# Altium PCB 检测板.PcbDoc
Units mm, origin at the board's own origin, x right, y up, seen from the top; angles counter-clockwise.
Board outline 145.25 x 7.25 mm, 2 copper layers (Top Layer, Bottom Layer); 24 components, 32 nets, 98 pads, 32 vias.
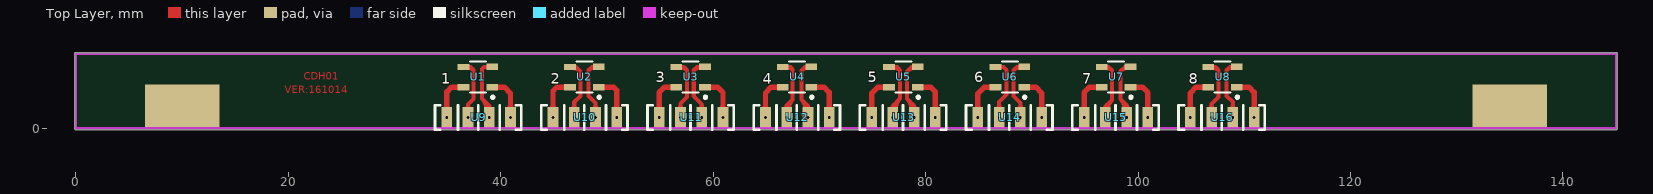
[diagram p0: Top Layer view]
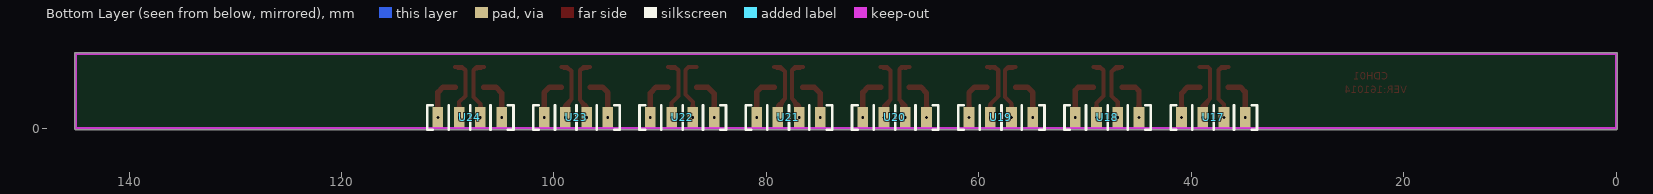
[diagram p1: Bottom Layer view, seen from below]

## Layer stack, top to bottom
Top Layer: signal copper 0.0356
Dielectric: dielectric 0.32, FR-4, Dk 4.8
Bottom Layer: signal copper 0.0356

## Board outline
0,-0.127 cw(c0,0) -0.127,0 -0.127,7 cw(c0,7) 0,7.127 144.985,7.127 cw(c144.985,7) 144.992,7.127 cw(c145,7) 145.127,7 145.127,0 cw(c145,0) 145,-0.127

## Design rules (kind name [scope] priority, off if disabled: settings)
Clearance [All] p1: gap=0.203
PolygonConnect [All] p1: connectstyle=Relief reliefconductorwidth=0.254 reliefentries=4 polygonreliefangle="90 Angle"
RoutingVias [All] p1: holewidth=0.711 width=1.27 viastyle="Through Hole" minholewidth=0.711 minwidth=1.27 maxholewidth=0.711 maxwidth=1.27
SilkscreenOverComponentPads [All] p1: minsilkscreentomaskgap=0.254
SolderMaskExpansion [All] p1: expansion=0.102
Width [All] p1: maxlimit=0.762 minlimit=0.254 preferedwidth=0.508
27 further rules are at their usual default settings.

## Classes and differential pairs
component class 检测板: U1 U2 U3 U4 U5 U6 U7 U8 U9 U10 U11 U12 U13 U14 U16

## Components (designator, comment, footprint, x,y, rotation, side; value= is the part's Value field where it differs from the comment)
U1 "1" SOT-23-4 37.846,4.826 r270 top
U2 "2" SOT-23-4 47.861,4.826 r270 top
U3 "3" SOT-23-4 57.876,4.826 r270 top
U4 "4" SOT-23-4 67.891,4.826 r270 top
U5 "5" SOT-23-4 77.905,4.826 r270 top
U6 "6" SOT-23-4 87.92,4.826 r270 top
U7 "7" SOT-23-4 97.935,4.826 r270 top
U8 "8" SOT-23-4 107.95,4.826 r270 top
U9 "Header 4" PIN4 40.917,1.012 r180 top
U10 "Header 4" PIN4 50.917,1.012 r180 top
U11 "Header 4" PIN4 60.917,1.012 r180 top
U12 "Header 4" PIN4 70.917,1.012 r180 top
U13 "Header 4" PIN4 80.917,1.012 r180 top
U14 "Header 4" PIN4 90.917,1.012 r180 top
U15 "Header 4" PIN4 100.917,1.012 r180 top
U16 "Header 4" PIN4 110.917,1.012 r180 top
U17 "Header 4" PIN4 40.917,1.012 r180 bottom (schematic designator U9)
U18 "Header 4" PIN4 50.917,1.012 r180 bottom (schematic designator U9)
U19 "Header 4" PIN4 60.917,1.012 r180 bottom (schematic designator U9)
U20 "Header 4" PIN4 70.917,1.012 r180 bottom (schematic designator U9)
U21 "Header 4" PIN4 80.917,1.012 r180 bottom (schematic designator U9)
U22 "Header 4" PIN4 90.917,1.012 r180 bottom (schematic designator U9)
U23 "Header 4" PIN4 100.917,1.012 r180 bottom (schematic designator U9)
U24 "Header 4" PIN4 110.917,1.012 r180 bottom (schematic designator U9)

## Footprints (in the part's own frame and the unit in brackets; to place one, negate y for a bottom-side part, rotate by r counter-clockwise, add the part's x,y. Pads: shape width x height; smd on the part's side, far side on the other; paste and mask are expansions set on the pad)
PIN4 [mm]
  rect 1x2 smd: 1(0,0) 2(2,0) 3(4,0) 4(6,0)
  silkscreen extent -1.02,-1.14 7.11,1.14
SOT-23-4 [mm] "SOT143, 4-Leads, Body 2.9x2.9mm (max), Pitch 1.92mm, IPC Medium De"
  rect 0.6x1.1 smd: 1(0.96,1.35) 2(-0.96,1.35) 3(-0.94,-1.35) 4(0.96,-1.35)
  silkscreen extent -1.45,-0.75 2.03,1.52, body extent -1.45,-0.77 1.45,0.77, height 1.2

## Part data
U1 U2 U3 U4 U5 U6 U7 U8: library part HW-101A
U9 U10 U11 U12 U13 U14 U15 U16 U17 U18 U19 U20 U21 U22 U23 U24: "Header, 4-P"

## Free pads (board coordinates)
  rect 7x4 smd: 0(10,2.13) 0(135,2.13)

## Via types
v1: diameter 0.5, hole 0.25, Top Layer to Bottom Layer, 32 vias

## Nets (pads, with @x,y where several pads share a name; then routed paths per layer and width w, separated by ;. In a path a pad name is that pad's centre, name@x,y a point inside that pad or via, vN(x,y) a via of type N, cw(c..) or ccw(c..) an arc to the next point about the centre after c; other vN are vias at no path point)
H1_IN1: U1.1 U9.1 | length 5.2
  Top Layer w0.508: U1.1 40.33,3.866 40.917,3.279 v1(40.917,1.012) ; U9.1@40.743,1.686 ccw(c40.323,2.106) 40.917,2.106 ccw(c41.511,2.106) U9.1@41.091,1.686
H1_IN3: U1.3 U9.3 | length 7.6
  Top Layer w0.381: U1.3 37.16,5.766 37.44,5.486 ; U9.3@36.701,1.734 ccw(c36.201,2.246) 36.917,2.246 ; U1.3@36.775,5.661 cw(c36.959,5.005) 37.44,5.486 ; v1(36.917,1.012) 36.917,2.246 ; U9.3@37.133,1.734 cw(c37.633,2.246) 36.917,2.246 ; 36.917,2.246 37.44,2.769 37.44,5.486
H1_OUT2: U1.2 U9.2 | length 8.9
  Top Layer w0.381: U9.2@38.612,1.567 ccw(c37.244,1.811) 38.227,2.794 ; U9.2@38.74,1.766 ccw(c38.506,2.104) 38.917,2.104 ; 38.743,2.278 cw(c38.12,1.655) U9.2@38.987,1.499 ; v1(38.917,1.012) 38.917,2.104 ; U9.2@39.094,1.766 cw(c39.328,2.104) 38.917,2.104 ; U1.2 38.425,5.786 38.227,5.588 38.227,2.794 ; 38.227,2.794 38.917,2.104
H1_OUT4: U1.4 U9.4 | length 5.1
  Top Layer w0.508: U9.4@34.743,1.686 ccw(c34.323,2.106) 34.917,2.106 ccw(c35.511,2.106) U9.4@35.091,1.686 ; v1(34.917,1.012) 34.917,3.421 35.362,3.866 U1.4
H2_IN1: U2.1 U10.1 | length 5.3
  Top Layer w0.508: U2.1 50.617,3.866 50.917,3.566 v1(50.917,1.012) ; U10.1@50.743,1.686 ccw(c50.323,2.106) 50.917,2.106 ccw(c51.511,2.106) U10.1@51.091,1.686
H2_IN3: U2.3 U10.3 | length 7.7
  Top Layer w0.381: U2.3 47.066,5.766 47.498,5.334 47.498,3.048 46.917,2.467 v1(46.917,1.012) ; U10.3@46.698,1.731 ccw(c46.17,2.259) 46.917,2.259 ccw(c47.664,2.259) U10.3@47.136,1.731 ; U2.3@46.761,5.657 cw(c46.761,4.655) 47.469,5.363
H2_OUT2: U2.2 U10.2 | length 7.7
  Top Layer w0.381: U10.2@48.698,1.731 ccw(c48.17,2.259) 48.917,2.259 ccw(c49.664,2.259) U10.2@49.136,1.731 ; v1(48.917,1.012) 48.917,2.391 48.26,3.048 48.26,5.461 ; U2.2@48.942,5.678 ccw(c48.811,4.91) 48.26,5.461 ; U2.2 48.585,5.786 48.26,5.461
H2_OUT4: U2.4 U10.4 | length 5.2
  Top Layer w0.508: U10.4@44.743,1.686 ccw(c44.323,2.106) 44.917,2.106 ccw(c45.511,2.106) U10.4@45.091,1.686 ; v1(44.917,1.012) 44.917,3.515 45.268,3.866 U2.4
H3_IN1: U3.1 U11.1 | length 5.2
  Top Layer w0.508: U3.1 60.396,3.866 60.917,3.345 v1(60.917,1.012) ; U11.1@60.743,1.686 ccw(c60.323,2.106) 60.917,2.106 ccw(c61.511,2.106) U11.1@61.091,1.686
H3_IN3: U3.3 U11.3 | length 7.8
  Top Layer w0.381: U3.3 57.226,5.766 57.531,5.461 ; U11.3@56.698,1.731 ccw(c56.17,2.259) 56.917,2.259 ccw(c57.664,2.259) U11.3@57.136,1.731 ; U3.3@56.803,5.66 cw(c56.993,4.923) 57.531,5.461 ; v1(56.917,1.012) 56.917,2.307 57.531,2.921 57.531,5.461
H3_OUT2: U3.2 U11.2 | length 8
  Top Layer w0.381: U11.2@58.698,1.731 ccw(c58.17,2.259) 58.917,2.259 ccw(c59.664,2.259) U11.2@59.136,1.731 ; v1(58.917,1.012) 58.917,2.297 58.166,3.048 58.166,5.461 ; U3.2@58.95,5.68 ccw(c58.752,4.875) 58.166,5.461 ; U3.2 58.491,5.786 58.166,5.461
H3_OUT4: U3.4 U11.4 | length 5.1
  Top Layer w0.508: U11.4@54.743,1.686 ccw(c54.323,2.106) 54.917,2.106 ccw(c55.511,2.106) U11.4@55.091,1.686 ; v1(54.917,1.012) 54.917,3.355 55.428,3.866 U3.4
H4_IN1: U4.1 U12.1 | length 5.2
  Top Layer w0.508: U4.1 70.429,3.866 70.917,3.378 v1(70.917,1.012) ; U12.1@70.743,1.686 ccw(c70.323,2.106) 70.917,2.106 ccw(c71.511,2.106) U12.1@71.091,1.686
H4_IN3: U4.3 U12.3 | length 9.4
  Top Layer w0.381: U4.3 67.259,5.766 67.484,5.541 ; U12.3@66.726,1.756 ccw(c66.42,2.147) 66.917,2.147 ; U4.3@66.834,5.665 cw(c67.067,5.124) 67.484,5.541 ; U12.3@66.849,1.491 cw(c67.587,1.723) 67.04,2.27 ; v1(66.917,1.012) 66.917,2.147 ; U12.3@67.108,1.756 cw(c67.414,2.147) 66.917,2.147 ; U12.3@67.212,1.605 cw(c68.263,1.935) 67.484,2.714 ; 66.917,2.147 67.484,2.714 ; 67.484,2.714 67.484,5.541
H4_OUT2: U4.2 U12.2 | length 9.2
  Top Layer w0.381: U12.2@68.616,1.582 ccw(c67.453,1.852) 68.297,2.696 ; U12.2@68.751,1.773 ccw(c68.558,2.076) 68.917,2.076 ; 68.782,2.211 cw(c68.24,1.669) U12.2@68.987,1.496 ; v1(68.917,1.012) 68.917,2.076 ; U4.2@68.98,5.677 ccw(c68.898,4.831) 68.297,5.432 ; U12.2@69.083,1.773 cw(c69.276,2.076) 68.917,2.076 ; U4.2 68.651,5.786 68.297,5.432 ; 68.297,2.696 68.297,5.432 ; 68.297,2.696 68.917,2.076
H4_OUT4: U4.4 U12.4 | length 5.1
  Top Layer w0.508: U12.4@64.743,1.686 ccw(c64.323,2.106) 64.917,2.106 ccw(c65.511,2.106) U12.4@65.091,1.686 ; v1(64.917,1.012) 64.917,3.322 65.461,3.866 U4.4
H5_IN1: U5.1 U13.1 | length 5.2
  Top Layer w0.508: U5.1 80.462,3.866 80.917,3.411 v1(80.917,1.012) ; U13.1@80.743,1.686 ccw(c80.323,2.106) 80.917,2.106 ccw(c81.511,2.106) U13.1@81.091,1.686
H5_IN3: U5.3 U13.3 | length 9.7
  Top Layer w0.381: U5.3 77.292,5.766 77.597,5.461 ; U13.3@76.737,1.764 ccw(c76.486,2.114) 76.917,2.114 ; U5.3@76.835,5.661 cw(c77.045,4.909) 77.597,5.461 ; U13.3@76.847,1.499 cw(c77.71,1.664) 77.089,2.286 ; v1(76.917,1.012) 76.917,2.114 ; U13.3@77.097,1.764 cw(c77.348,2.114) 76.917,2.114 ; U13.3@77.221,1.57 cw(c78.564,1.827) 77.597,2.794 ; 76.917,2.114 77.597,2.794 ; 77.597,2.794 77.597,5.461
H5_OUT2: U5.2 U13.2 | length 9.6
  Top Layer w0.381: 78.27,5.372 cw(c79.005,4.636) U5.2@79.005,5.677 ; U13.2@78.613,1.568 ccw(c77.257,1.819) 78.232,2.794 ; U13.2@78.739,1.765 ccw(c78.496,2.109) 78.917,2.109 ; 78.744,2.282 cw(c78.122,1.659) U13.2@78.987,1.499 ; v1(78.917,1.012) 78.917,2.109 ; U13.2@79.095,1.765 cw(c79.338,2.109) 78.917,2.109 ; U5.2 78.684,5.786 78.232,5.334 78.232,2.794 ; 78.232,2.794 78.917,2.109
H5_OUT4: U5.4 U13.4 | length 5.1
  Top Layer w0.508: U13.4@74.743,1.686 ccw(c74.323,2.106) 74.917,2.106 ccw(c75.511,2.106) U13.4@75.091,1.686 ; v1(74.917,1.012) 74.917,3.289 75.494,3.866 U5.4
H6_IN1: U6.1 U14.1 | length 5.1
  Top Layer w0.508: U6.1 90.368,3.866 90.917,3.317 v1(90.917,1.012) ; U14.1@90.743,1.686 ccw(c90.323,2.106) 90.917,2.106 ccw(c91.511,2.106) U14.1@91.091,1.686
H6_IN3: U6.3 U14.3 | length 7.1
  Top Layer w0.381: U6.3 87.325,5.766 87.63,5.461 87.63,3.175 86.917,2.462 v1(86.917,1.012) ; U14.3@86.698,1.731 ccw(c86.17,2.259) 86.917,2.259 ccw(c87.664,2.259) U14.3@87.136,1.731
H6_OUT2: U6.2 U14.2 | length 7.8
  Top Layer w0.381: U14.2@88.698,1.731 ccw(c88.17,2.259) 88.917,2.259 ccw(c89.664,2.259) U14.2@89.136,1.731 ; v1(88.917,1.012) 88.917,2.396 88.265,3.048 88.265,5.461 ; U6.2@88.998,5.679 ccw(c88.832,4.894) 88.265,5.461 ; U6.2 88.59,5.786 88.265,5.461
H6_OUT4: U6.4 U14.4 | length 5.1
  Top Layer w0.508: U14.4@84.743,1.686 ccw(c84.323,2.106) 84.917,2.106 ccw(c85.511,2.106) U14.4@85.091,1.686 ; v1(84.917,1.012) 84.917,3.256 85.527,3.866 U6.4
H7_IN1: U7.1 U15.1 | length 5.1
  Top Layer w0.508: U7.1 100.401,3.866 100.917,3.35 v1(100.917,1.012) ; U15.1@100.743,1.686 ccw(c100.323,2.106) 100.917,2.106 ccw(c101.511,2.106) U15.1@101.091,1.686
H7_IN3: U7.3 U15.3 | length 9.1
  Top Layer w0.381: U7.3 97.231,5.766 97.536,5.461 ; U15.3@96.762,1.78 ccw(c96.608,2.048) 96.917,2.048 ; U15.3@96.847,1.496 cw(c97.565,1.656) 97.045,2.176 ; U7.3@96.859,5.659 cw(c97.016,4.942) 97.536,5.461 ; v1(96.917,1.012) 96.917,2.048 ; U15.3@97.072,1.78 cw(c97.226,2.048) 96.917,2.048 ; U15.3@97.219,1.579 cw(c98.368,1.834) 97.536,2.667 ; 96.917,2.048 97.536,2.667 ; 97.536,2.667 97.536,5.461
H7_OUT2: U7.2 U15.2 | length 9.6
  Top Layer w0.381: 98.361,5.397 cw(c99.035,4.724) U7.2@99.035,5.677 ; U15.2@98.622,1.605 ccw(c97.538,1.947) 98.341,2.751 ; U15.2@98.718,1.749 ccw(c98.362,2.175) 98.917,2.175 ; 98.785,2.307 cw(c98.213,1.734) U15.2@98.985,1.491 ; v1(98.917,1.012) 98.917,2.175 ; U15.2@99.116,1.749 cw(c99.472,2.175) 98.917,2.175 ; U7.2 98.75,5.786 98.341,5.377 98.341,2.751 ; 98.341,2.751 98.917,2.175
H7_OUT4: U7.4 U15.4 | length 5.2
  Top Layer w0.508: U15.4@94.743,1.686 ccw(c94.323,2.106) 94.917,2.106 ccw(c95.511,2.106) U15.4@95.091,1.686 ; v1(94.917,1.012) 94.917,3.35 95.433,3.866 U7.4
H8_IN1: U8.1 U16.1 | length 5.1
  Top Layer w0.508: U8.1 110.434,3.866 110.917,3.383 v1(110.917,1.012) ; U16.1@110.743,1.686 ccw(c110.323,2.106) 110.917,2.106 ccw(c111.511,2.106) U16.1@111.091,1.686
H8_IN3: U8.3 U16.3 | length 7.7
  Top Layer w0.381: U8.3 107.264,5.766 107.569,5.461 ; U16.3@106.698,1.731 ccw(c106.17,2.259) 106.917,2.259 ccw(c107.664,2.259) U16.3@107.136,1.731 ; U8.3@106.875,5.659 cw(c107.043,4.935) 107.569,5.461 ; v1(106.917,1.012) 106.917,2.269 107.569,2.921 107.569,5.461
H8_OUT2: U8.2 U16.2 | length 7.7
  Top Layer w0.381: U16.2@108.698,1.731 ccw(c108.17,2.259) 108.917,2.259 ccw(c109.664,2.259) U16.2@109.136,1.731 ; v1(108.917,1.012) 108.917,2.462 108.331,3.048 108.331,5.461 ; U8.2@109.03,5.678 ccw(c108.887,4.905) 108.331,5.461 ; U8.2 108.656,5.786 108.331,5.461
H8_OUT4: U8.4 U16.4 | length 5.1
  Top Layer w0.508: U16.4@104.743,1.686 ccw(c104.323,2.106) 104.917,2.106 ccw(c105.511,2.106) U16.4@105.091,1.686 ; v1(104.917,1.012) 104.917,3.317 105.466,3.866 U8.4
pads on no net: U17.1 U17.2 U17.3 U17.4 U18.1 U18.2 U18.3 U18.4 U19.1 U19.2 U19.3 U19.4 U20.1 U20.2 U20.3 U20.4 U21.1 U21.2 U21.3 U21.4 U22.1 U22.2 U22.3 U22.4 U23.1 U23.2 U23.3 U23.4 U24.1 U24.2 U24.3 U24.4

## Keep-outs
Keep-Out Layer:
  lines w0.254: 144.985,7 0,7 0,0 145,0 145,7

## Other copper
Top Layer:
  text "CDH01" at 21.463,4.572 h0.7
  text "VER:161014" at 19.685,3.302 h0.7